# EAGLE board imu_pcb (EAGLE 7.2.0)
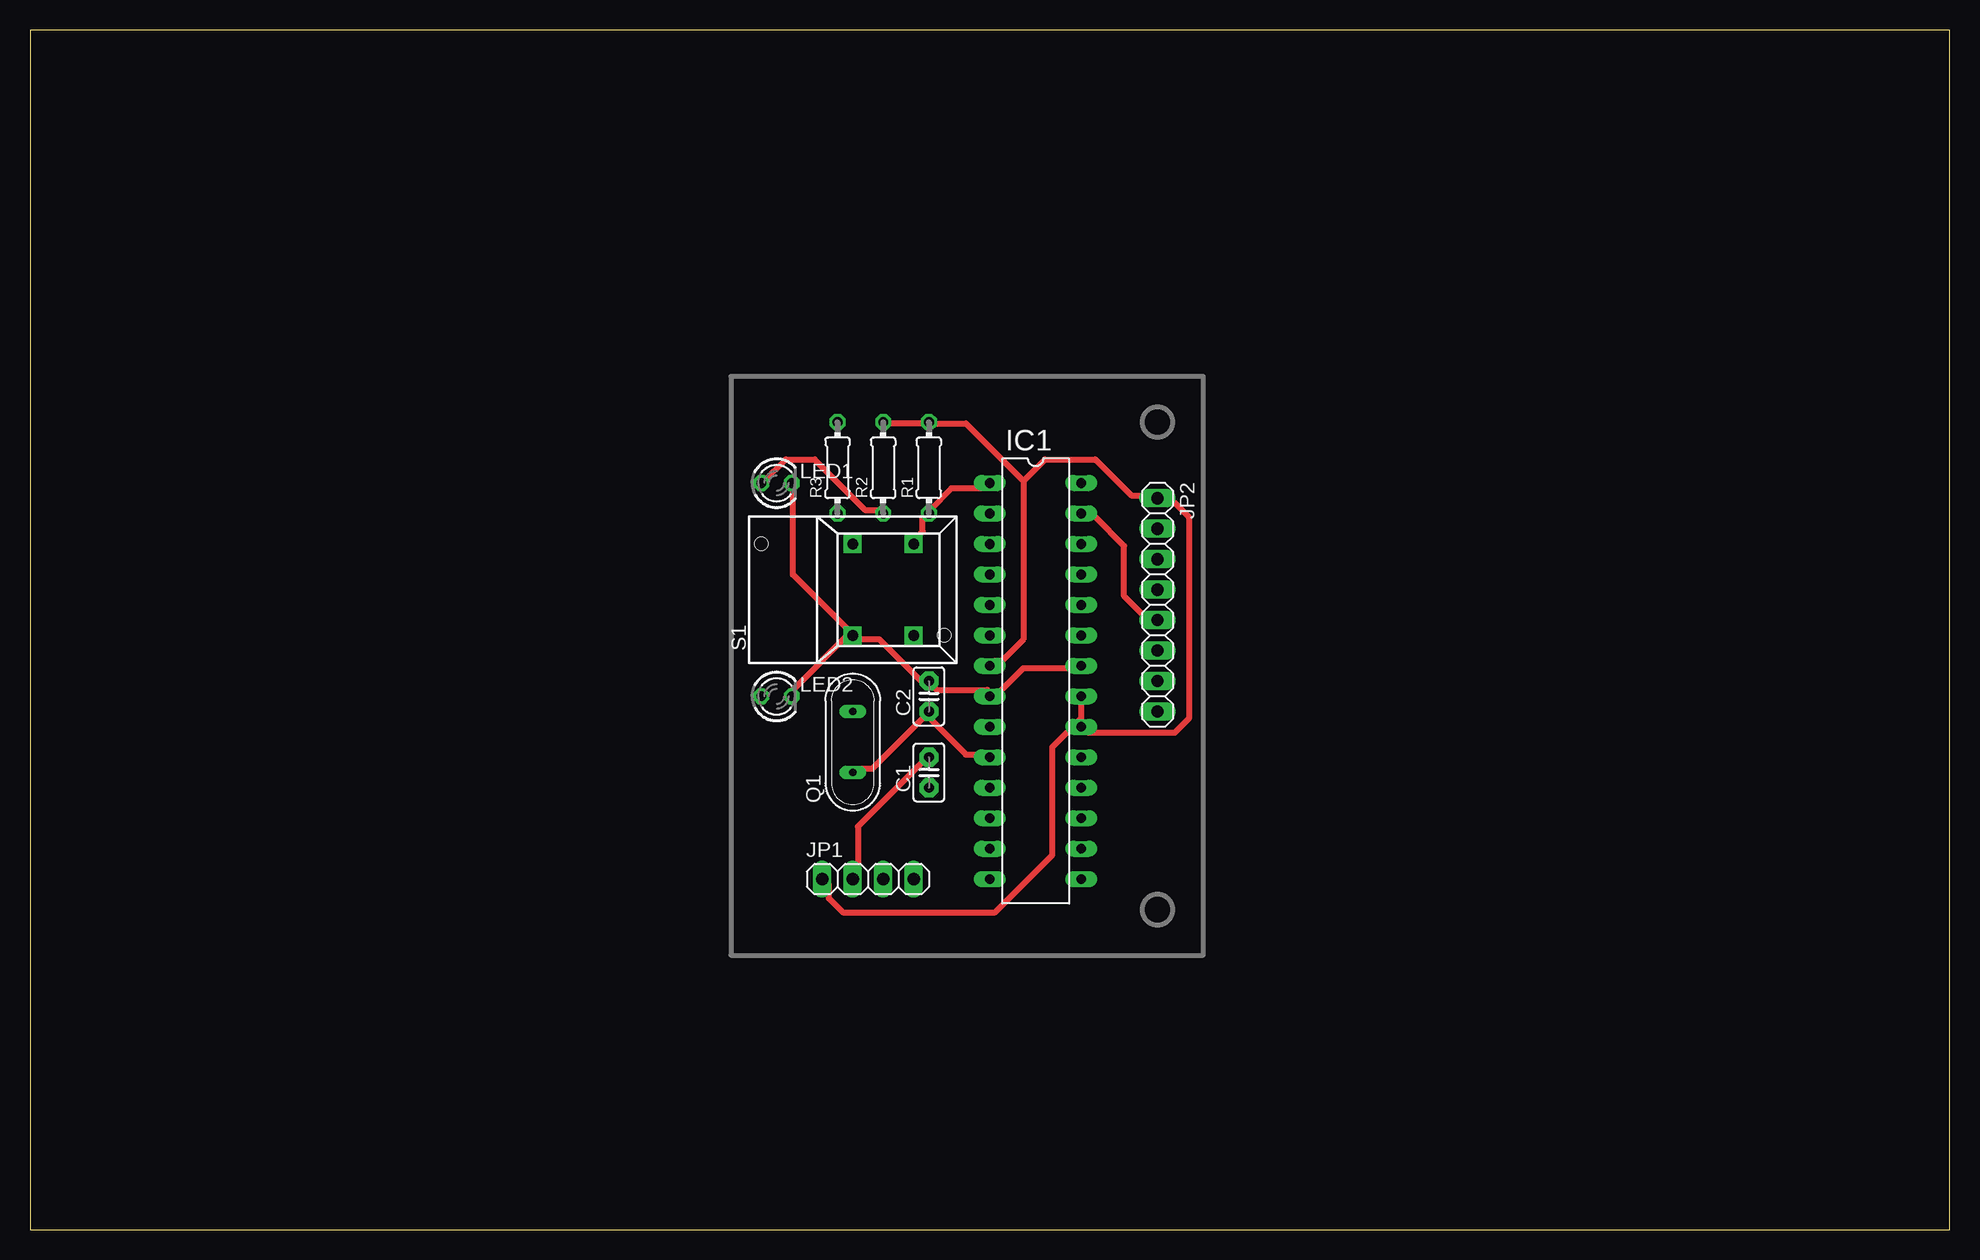
[diagram p0: board, top side]
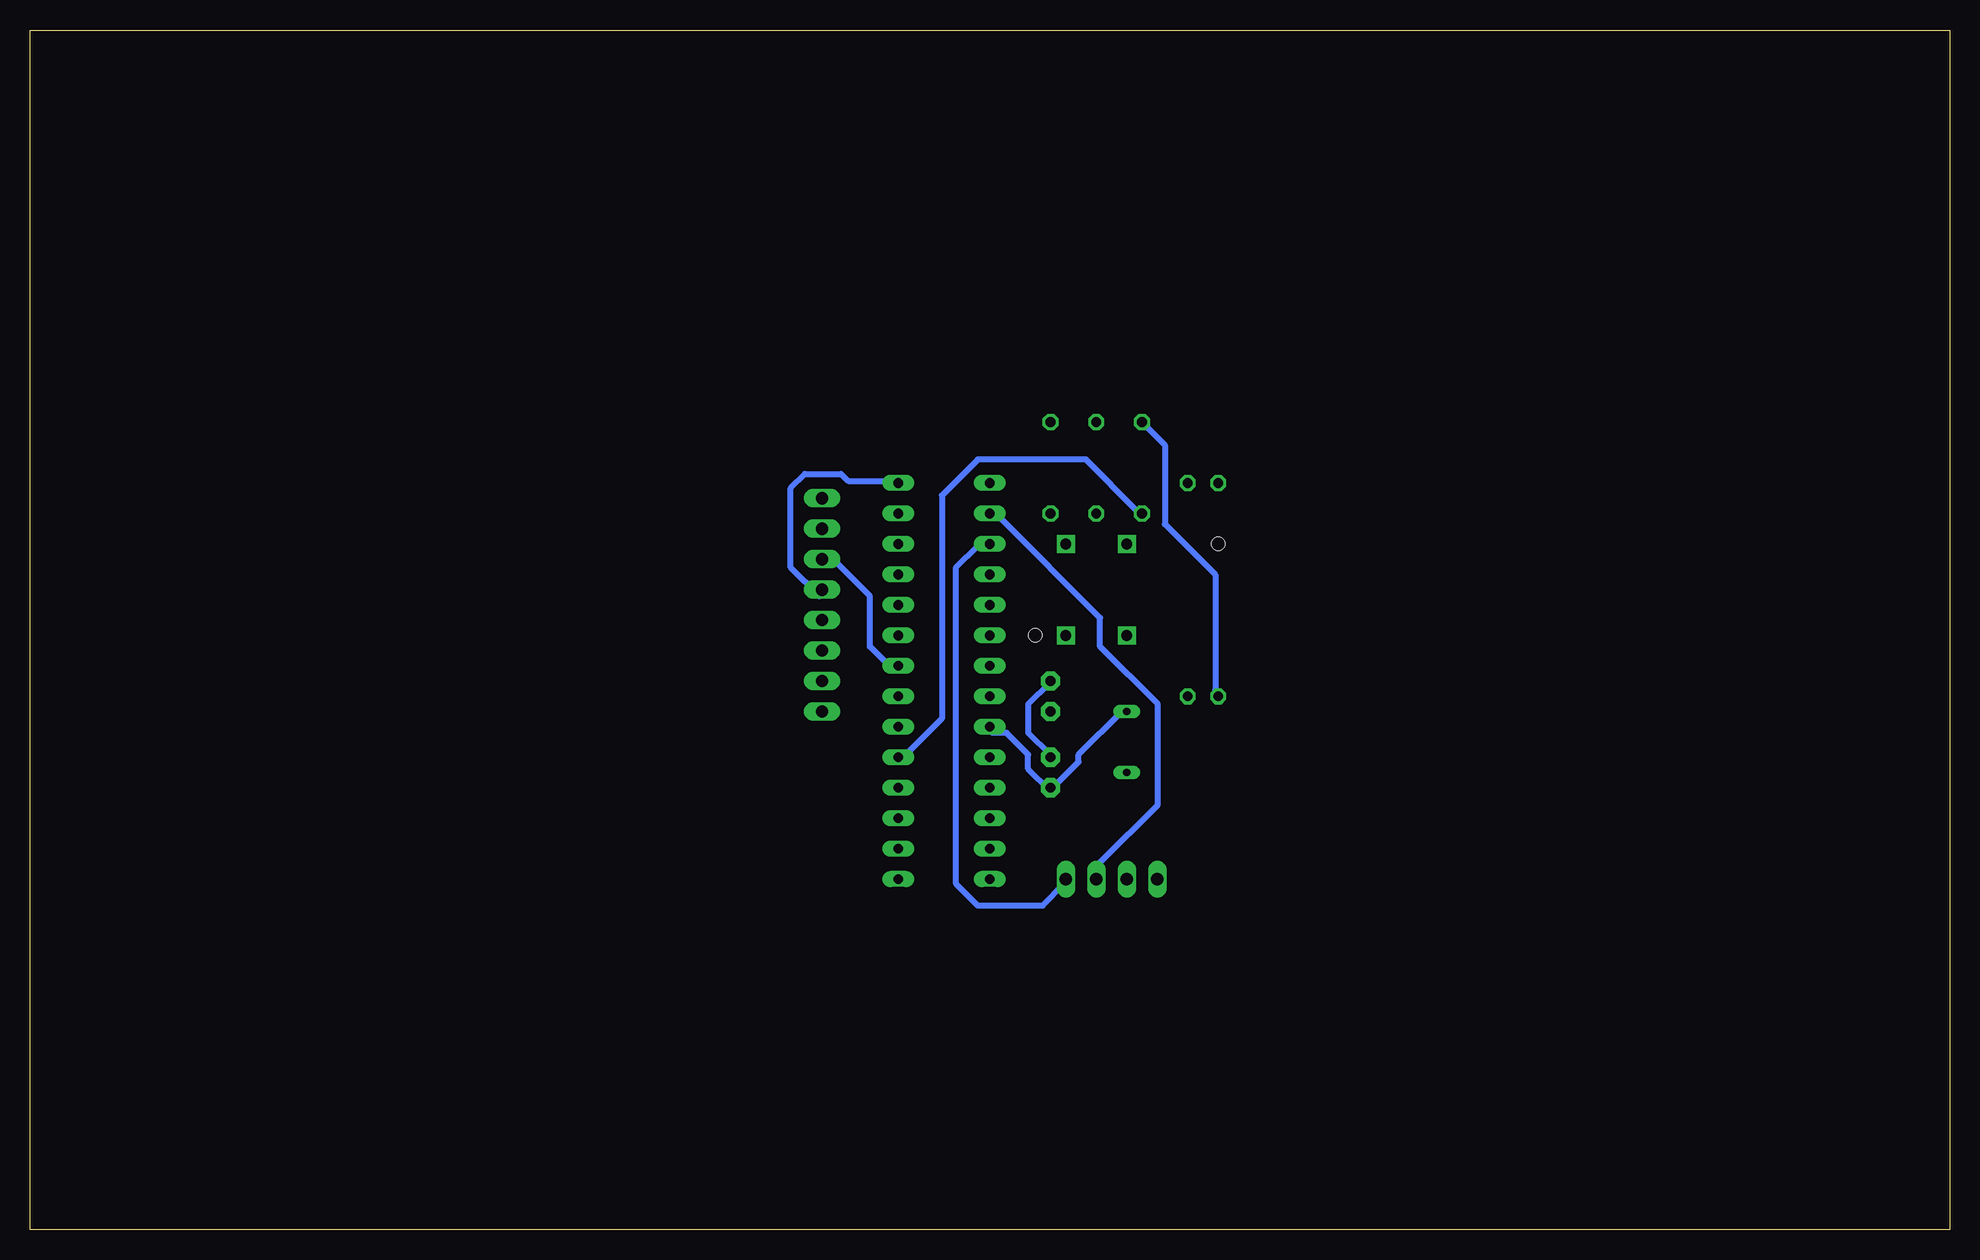
[diagram p1: board, bottom side, seen from below]

Size 160 x 100 mm. Coordinates in mm from the lower left corner, seen from the top.
Outline: 0,0 160,0 160,100 0,100 0,0
Copper layers (1*16): Top 0.035mm / dielectric 1.5mm / Bottom 0.035mm
Design rules "default *": minimum track width 0.5mm, minimum drill 24mil, track to track 0.7mm, track to pad 0.7mm, pad to pad 0.7mm, via to via 0.7mm, smd to smd 0.7mm, copper to edge 40mil, drill to drill 8mil, minimum pad ring 10mil, minimum via ring 8mil, stop-mask expansion 4mil, vias tented up to drill 0mil, thermal gap 10mil

## Footprints (pad centres in the part's own frame; a part is rotated, then mirrored left to right if it is on the bottom)
C2.5-2 = drill 0.813 pad 1.6 octagon: 1 -1.27,0; 2 1.27,0
DIL28-3 = drill 0.813 long: 1 -16.51,-3.81; 2 -13.97,-3.81; 3 -11.43,-3.81; 4 -8.89,-3.81; 5 -6.35,-3.81; 6 -3.81,-3.81; 7 -1.27,-3.81; 8 1.27,-3.81; 9 3.81,-3.81; 10 6.35,-3.81; 11 8.89,-3.81; 12 11.43,-3.81; 13 13.97,-3.81; 14 16.51,-3.81; 15 16.51,3.81; 16 13.97,3.81; 17 11.43,3.81; 18 8.89,3.81; 19 6.35,3.81; 20 3.81,3.81; 21 1.27,3.81; 22 -1.27,3.81; 23 -3.81,3.81; 24 -6.35,3.81; 25 -8.89,3.81; 26 -11.43,3.81; 27 -13.97,3.81; 28 -16.51,3.81
1X04 = drill 1.016 long: 1 -3.81,0; 2 -1.27,0; 3 1.27,0; 4 3.81,0
1X08 = drill 1.016 long: 1 -8.89,0; 2 -6.35,0; 3 -3.81,0; 4 -1.27,0; 5 1.27,0; 6 3.81,0; 7 6.35,0; 8 8.89,0
LED3MM = drill 0.813 octagon: A -1.27,0; K 1.27,0
QS = drill 0.61 long: 1 -2.54,0; 2 2.54,0
0204/7 = drill 0.813 octagon: 1 -3.81,0; 2 3.81,0
5501 = drill 0.9 pad 1.5 square: 1A 0,3.81; 1B 0,-3.81; NC 5.08,-3.81; NO 5.08,3.81 | hole 1.1: -7.62,3.81; 7.62,-3.81

## Placement (x,y rotation side)
C1  [C2.5-2]  74.93,38.1 90 top
C2  [C2.5-2]  74.93,44.45 90 top
IC1  ATMEGA168-PU  [DIL28-3]  83.82,45.72 270 top
JP1  [1X04]  69.85,29.21 0 top
JP2  [1X08]  93.98,52.07 270 top
LED1  [LED3MM]  62.23,62.23 0 top
LED2  [LED3MM]  62.23,44.45 0 top
Q1  [QS]  68.58,40.64 90 top
R1  [0204/7]  74.93,63.5 90 top
R2  [0204/7]  71.12,63.5 90 top
R3  [0204/7]  67.31,63.5 90 top
S1  5501  [5501]  68.58,53.34 0 top

## Library data of the parts
C1 C2 = capacitor-wima
IC1 = Arduino-AVR
JP1 JP2 = pinhead
LED1 LED2 = led
Q1 = special
R1-R3 = eagle-ltspice; SPICEMODEL: NONE; SPICEPREFIX: R
S1 = switch

## Nets
N$1: IC1.1 R1.1 S1.NO
N$3: IC1.7 IC1.20 IC1.21 JP1.1 JP2.1 R1.2 R2.2
N$4: LED1.A R2.1
N$5: C1.1 IC1.9 Q1.2
N$6: C2.1 IC1.10 Q1.1
N$7: IC1.2 JP1.3
N$8: IC1.3 JP1.4
N$9: C1.2 C2.2 IC1.8 IC1.22 JP1.2 JP2.3 LED1.K LED2.K S1.1B
N$12: IC1.27 JP2.5
N$13: IC1.28 JP2.4
N$15: IC1.19 R3.1
N$16: LED2.A R3.2

## Tracks (layer width: path | path; a pad name or v marks a point on that pad's centre or on a via)
N$1
  Top 0.5: S1.NO 73.8,57.6 74.4,58.2 74.4,59.4 R1.1 75,60 76.8,61.8 79.8,61.8 IC1.1
N$3
  Top 0.5: 87.6,42.6 87.6,44.4 IC1.21 | 87.6,42.6 87.6,42 IC1.20 88.2,41.4 95.4,41.4 96.6,42.6 96.6,59.4 95.4,60.6 94.2,60.6 JP2.1 93.6,61.2 91.8,61.2 88.8,64.2 84.6,64.2 82.8,62.4 | 87.6,42.6 85.2,40.2 85.2,31.2 80.4,26.4 67.8,26.4 66.6,27.6 66.6,28.8 JP1.1 | 82.8,62.4 82.8,49.2 81,47.4 80.4,47.4 IC1.7 | 82.8,62.4 78,67.2 75,67.2 R1.2 74.4,67.2 71.4,67.2 R2.2
N$4
  Top 0.5: R2.1 70.8,60 69.6,60 65.4,64.2 63,64.2 61.2,62.4 LED1.A
N$5
  Bottom 0.5: Q1.2 69,43.2 72.6,39.6 72.6,39 74.4,37.2 C1.1 75,36.6 76.8,38.4 76.8,39.6 78.6,41.4 79.8,41.4 IC1.9
N$6
  Top 0.5: Q1.1 69,38.4 70.2,38.4 74.4,42.6 C2.1 75,42.6 78,39.6 79.8,39.6 IC1.10
N$7
  Bottom 0.5: IC1.2 79.8,59.4 79.2,59.4 70.8,51 70.8,48.6 66,43.8 66,35.4 70.8,30.6 70.8,29.4 JP1.3
N$8
  Bottom 0.5: IC1.3 80.4,57 81,57 82.8,55.2 82.8,28.8 81,27 75.6,27 73.8,28.8 JP1.4
N$9
  Top 0.5: 68.4,49.8 63.6,45 LED2.K | 68.4,49.8 63.6,54.6 63.6,61.8 LED1.K | 68.4,49.8 S1.1B 69,49.2 70.8,49.2 74.4,45.6 C2.2 75,45.6 75.6,45 79.8,45 IC1.8 80.4,44.4 82.8,46.8 87.6,46.8 IC1.22 | JP1.2 69,29.4 69,33.6 74.4,39 C1.2
  Bottom 0.5: JP2.3 93.6,55.8 93,55.8 90,52.8 90,48.6 88.2,46.8 IC1.22 | C1.2 75,39.6 76.8,41.4 76.8,43.8 75,45.6 C2.2
N$12
  Top 0.5: IC1.27 88.2,59.4 88.8,59.4 91.2,57 91.2,52.8 93.6,50.4 JP2.5
N$13
  Bottom 0.5: IC1.28 88.2,62.4 91.8,62.4 92.4,63 95.4,63 96.6,61.8 96.6,55.2 94.2,52.8 JP2.4
N$15
  Bottom 0.5: IC1.19 87.6,39.6 87,39.6 84,42.6 84,61.2 81,64.2 72,64.2 67.8,60 R3.1
N$16
  Bottom 0.5: R3.2 65.4,65.4 65.4,58.8 61.2,54.6 61.2,45 LED2.A

## Text on the board
tDocu: IEEE UPP FUNDED | 5V | S | L1 | G | C | D | S | L2 | 5V | G | R | T | SRL - NASA